# EAGLE board 7segment (EAGLE 6.5.0)
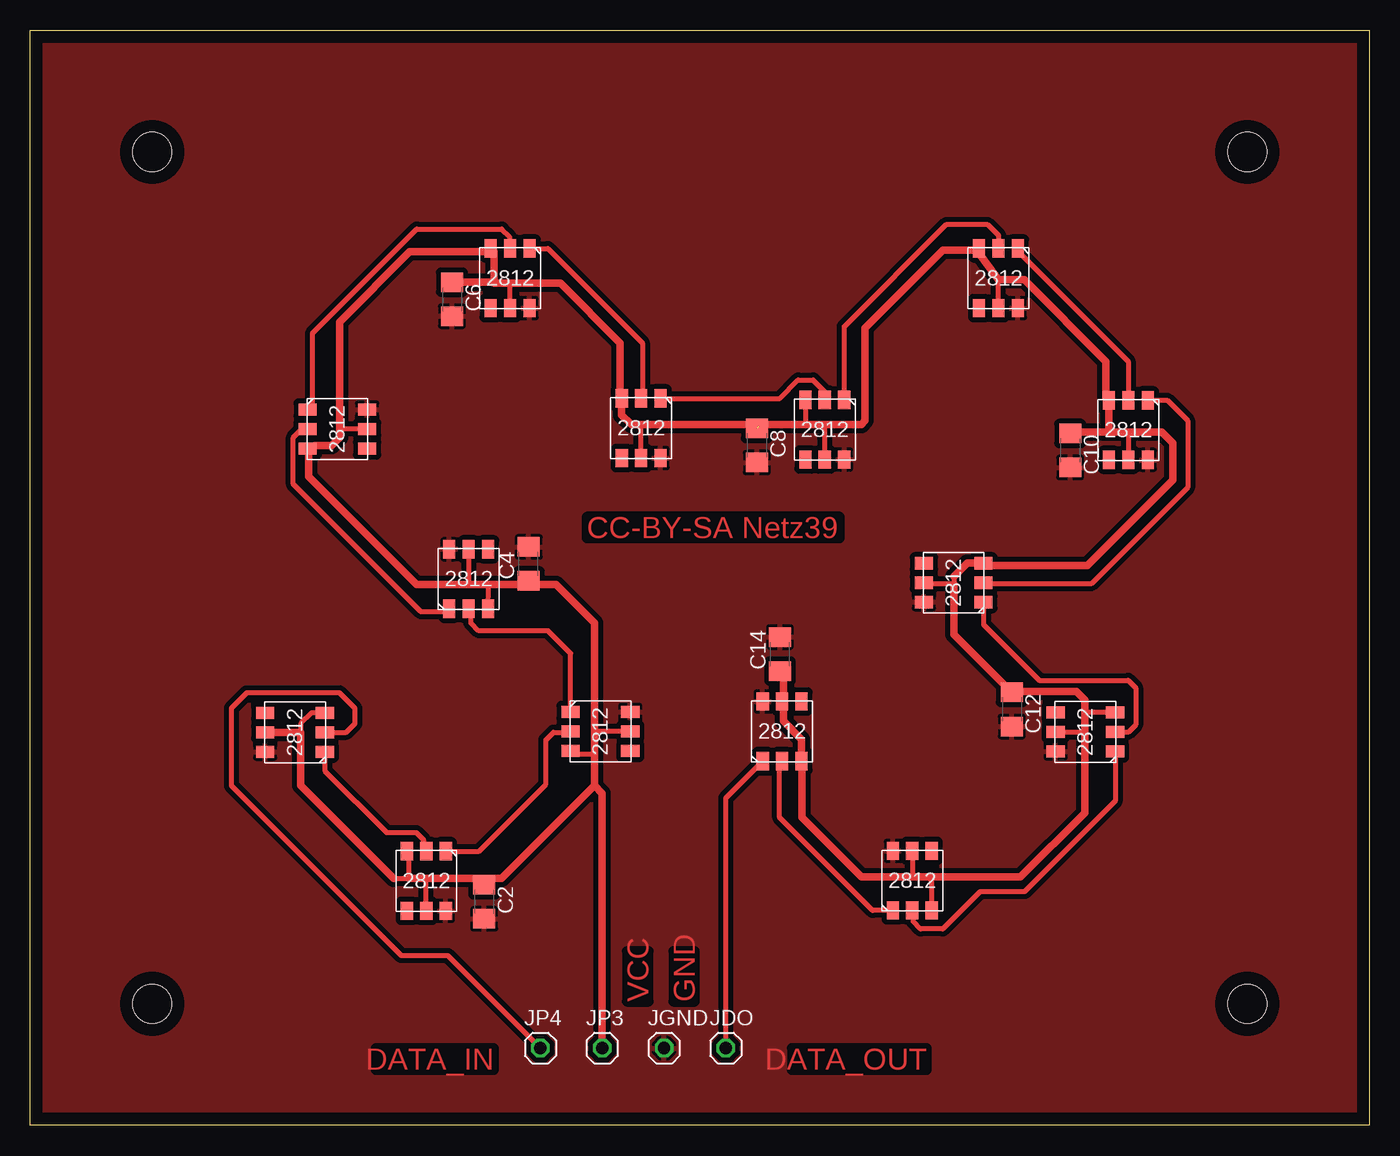
[diagram p0: board, top side]

Size 110.01 x 89.99 mm. Coordinates in mm from the lower left corner, seen from the top.
Outline: 0,89.99 110.01,89.99 110.01,0 0,0 0,89.99
Copper layers (1*16): Top 0.035mm / dielectric 1.5mm / Bottom 0.035mm
Design rules "default": minimum track width 10mil, minimum drill 24mil, track to track 8mil, track to pad 8mil, pad to pad 8mil, via to via 8mil, smd to smd 8mil, copper to edge 40mil, drill to drill 8mil, minimum pad ring 10mil, minimum via ring 8mil, stop-mask expansion 4mil, vias tented up to drill 0mil, thermal gap 10mil
Holes 3.2 mm at 10,80 10,10 100,80 100,10

## Footprints (pad centres in the part's own frame; a part is rotated, then mirrored left to right if it is on the bottom)
C1206 = smd 1.6 x 1.8: 1 -1.4,0; 2 1.4,0
1X01 = drill 1.016 octagon: 1 0,0
WS2812 = smd 1.5 x 1: 1 2.45,-1.6; 2 2.45,0; 3 2.45,1.6; 4 -2.45,1.6; 5 -2.45,0; 6 -2.45,-1.6

## Placement (x,y rotation side)
C2  [C1206]  37.29,18.39 270 top
C4  [C1206]  40.94,46.15 90 top
C6  [C1206]  34.65,67.89 270 top
C8  [C1206]  59.69,55.88 270 top
C10  [C1206]  85.45,55.47 270 top
C12  [C1206]  80.64,34.19 270 top
C14  [C1206]  61.59,38.73 90 top
JDO  DO  [1X01]  57.15,6.35 0 top
JGND  GND  [1X01]  52.07,6.35 0 top
JP3  VDD  [1X01]  46.99,6.35 0 top
JP4  DI  [1X01]  41.91,6.35 0 top
U1  WS2812  [WS2812]  21.74,32.31 0 top
U2  WS2812  [WS2812]  32.54,20.09 90 top
U3  WS2812  [WS2812]  46.84,32.38 180 top
U4  WS2812  [WS2812]  36.02,44.91 270 top
U5  WS2812  [WS2812]  25.22,57.23 180 top
U6  WS2812  [WS2812]  39.42,69.62 90 top
U7  WS2812  [WS2812]  50.19,57.3 90 top
U8  WS2812  [WS2812]  65.28,57.18 90 top
U9  WS2812  [WS2812]  79.55,69.62 90 top
U10  WS2812  [WS2812]  90.22,57.15 90 top
U11  WS2812  [WS2812]  75.87,44.6 0 top
U12  WS2812  [WS2812]  86.69,32.33 0 top
U13  WS2812  [WS2812]  72.47,20.12 270 top
U14  WS2812  [WS2812]  61.77,32.38 270 top

## Library data of the parts
C2 C4 C6 C8 C10 C12 C14 = resistor
JDO JGND JP3 JP4 = pinhead
U1-U14 = n39

## Nets
GND: C2.2 C4.2 C6.2 C8.2 C10.2 C12.2 C14.2 JGND.1 U1.6 U2.6 U3.6 U4.6 U5.6 U6.6 U7.6 U8.6 U9.6 U10.6 U11.6 U12.6 U13.6 U14.6
JDI: JP4.1 U1.2
N$1: U1.1 U2.2
N$2: U2.1 U3.2
N$3: U7.1 U8.2
N$4: JDO.1 U14.1
N$5: U3.1 U4.2
N$7: U4.1 U5.2
N$8: U5.1 U6.2
N$9: U6.1 U7.2
N$10: U8.1 U9.2
N$11: U9.1 U10.2
N$12: U10.1 U11.2
N$13: U11.1 U12.2
N$14: U12.1 U13.2
N$15: U13.1 U14.2
VCC: C2.1 C4.1 C6.1 C8.1 C10.1 C12.1 C14.1 JP3.1 U1.3 U1.5 U2.3 U2.5 U3.3 U3.5 U4.3 U4.5 U5.3 U5.5 U6.3 U6.5 U7.3 U7.5 U8.3 U8.5 U9.3 U9.5 U10.3 U10.5 U11.3 U11.5 U12.3 U12.5 U13.3 U13.5 U14.3 U14.5

## Tracks (layer width: path | path; a pad name or v marks a point on that pad's centre or on a via)
GND
  pour Top (isolate 0.406): 0,0 109.86,0 109.86,89.53 0,89.53
JDI
  Top 0.406: U1.2 25.96,32.31 26.67,33.02 26.67,34.29 25.4,35.56 17.78,35.56 16.51,34.29 16.51,27.94 30.48,13.97 34.29,13.97 JP4.1
N$1
  Top 0.406: U1.1 24.19,29.15 29.26,24.08 31.7,24.08 32.31,23.47 32.31,22.77 U2.2
N$2
  Top 0.406: U2.1 36.87,22.54 42.37,28.04 42.37,31.7 42.98,32.31 44.31,32.31 U3.2
N$3
  Top 0.406: U7.1 61.58,59.75 63.09,61.27 64.31,61.27 65.23,60.35 65.23,59.68 U8.2
N$4
  Top 0.406: JDO.1 57.15,26.91 U14.1
N$5
  Top 0.406: U3.1 44.39,38.8 42.55,40.64 36.83,40.64 36.2,41.27 36.2,42.28 U4.2
N$7
  Top 0.406: U5.2 23.03,57.15 22.23,57.15 21.59,56.52 21.59,52.7 32.07,42.23 34.19,42.23 U4.1
N$8
  Top 0.406: U6.2 39.37,72.02 39.37,73.03 38.73,73.66 31.75,73.66 23.15,65.06 23.15,59.21 U5.1
N$9
  Top 0.406: U6.1 42.53,72.07 50.29,64.31 50.29,59.85 U7.2
N$10
  Top 0.406: U8.1 66.88,65.66 75.29,74.07 78.64,74.07 79.55,73.15 U9.2
N$11
  Top 0.406: U9.1 81.15,71.86 90.22,62.79 U10.2
N$12
  Top 0.406: U10.1 93.41,59.6 95.1,57.91 95.1,52.43 87.17,44.5 78.42,44.5 U11.2
N$13
  Top 0.406: U11.1 78.32,41.16 82.91,36.58 90.22,36.58 90.83,35.97 90.83,32.92 90.22,32.31 89.17,32.31 U12.2
N$14
  Top 0.406: U12.1 89.14,26.66 81.69,19.2 78.03,19.2 74.98,16.15 73.15,16.15 72.54,16.76 72.54,17.59 U13.2
N$15
  Top 0.406: U13.1 69.2,17.67 61.57,25.3 61.57,29.73 U14.2
VCC  (1 unrouted)
  Top 0.406: U1.3 23.11,33.91 22.23,33.02 22.23,32.31 | 32.38,20.32 32.49,20.22 32.49,17.69 U2.5 | U4.3 37.67,44.25 37.47,44.45 | 36.2,44.45 36.07,44.58 36.07,47.31 U4.5 | 29.84,20.32 31.11,20.32 31.11,22.06 U2.3 | 22.86,55.34 U5.3 23.36,55.88 | 25.4,57.15 25.53,57.28 25.58,57.23 U5.5 | 46.35,30.48 44.69,30.48 U3.3 | U3.5 46.35,32.38 | 48.46,59.88 U7.3 | U6.5 39.42,69.11 39.32,69.22 | 37.54,71.79 U6.3 38.1,71.79 | U7.5 50.19,57.51 50.29,57.61 | U8.3 63.68,57.63 63.7,57.61 | U9.5 79.55,69.5 | U9.3 77.81,71.93 77.81,71.85 | 88.39,59.83 U10.3 | 78.5,46.02 U11.3 | 90.22,57 U10.5 | 75.89,45.11 75.89,44.5 73.52,44.5 U11.5 | U12.3 86.77,33.93 86.67,33.83 | U12.5 86.64,32.33 86.67,32.31 | U13.5 72.47,20.49 72.54,20.41 | U13.3 74.07,20.11 73.76,20.41 | 63.4,29.91 U14.3 | 61.87,34.73 U14.5 | U8.5 65.28,57.56 65.23,57.61 | 38.02,69.29 38.1,69.22 | C4.1 40.95,44.55 40.84,44.45 | C2.1 37.29,20.12 37.49,20.32 | 85.57,57 C10.1 | 88.62,57.07 88.7,57 | 80.72,35.66 C12.1 | 59.84,57.45 59.69,57.61 | 61.87,37.06 C14.1
  Top 0.61: 29.84,20.32 22.23,27.94 22.23,32.31 U1.5 | 31.11,20.32 32.38,20.32 37.49,20.32 38.73,20.32 46.35,27.94 | 22.86,55.34 22.86,53.34 31.75,44.45 36.2,44.45 37.47,44.45 40.84,44.45 43.18,44.45 46.35,41.27 46.35,32.38 46.35,30.48 46.35,27.94 | 23.36,55.88 24.77,55.88 25.4,56.52 25.4,57.15 25.4,66.04 31.15,71.79 37.54,71.79 | 48.46,59.88 48.46,64.31 43.56,69.22 39.32,69.22 38.1,69.22 38.1,71.79 | U7.3 48.59,58.39 49.38,57.61 50.29,57.61 59.69,57.61 63.7,57.61 65.23,57.61 68.28,57.61 68.58,57.91 68.58,65.53 74.98,71.93 77.81,71.93 | 77.81,71.85 79.55,69.5 81.68,69.5 88.39,62.79 88.39,59.83 | 78.5,46.02 86.87,46.02 93.88,53.03 93.88,56.08 92.96,57 90.22,57 88.7,57 85.57,57 | U11.3 76.99,46.2 75.89,45.11 | 63.4,29.91 63.4,25.3 68.29,20.41 72.54,20.41 73.76,20.41 81.37,20.41 86.67,25.7 86.67,32.31 86.67,33.83 86.67,34.95 85.95,35.66 80.72,35.66 | U14.3 63.37,31.73 61.87,33.22 61.87,34.73 61.87,37.06 | C6.1 38.02,69.29 | U10.3 88.62,57.07 | 75.89,44.5 75.89,40.34 C12.1 | JP3.1 46.99,27.3 46.35,27.94

## Text on the board
Top: CC-BY-SA Netz39 | VCC | GND | DATA_IN | DATA_OUT